# EAGLE board fabwalker-0930-2 (EAGLE 7.4.0)
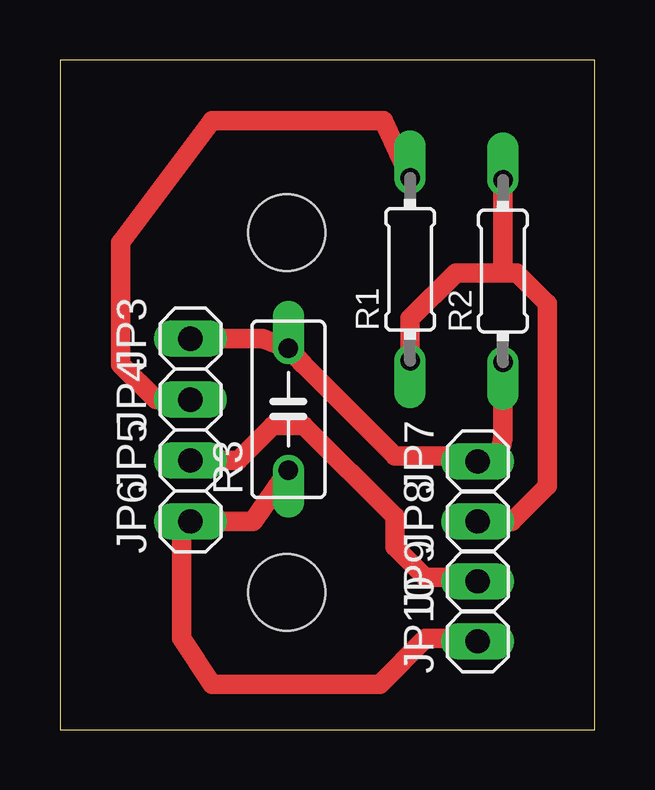
[diagram p0: board, top side]

Size 22.3 x 27.93 mm. Coordinates in mm from the lower left corner, seen from the top.
Outline: 0,0 22.3,0 22.3,27.93 0,27.93 0,0
Copper layers (1*16): Top 0.035mm / dielectric 1.5mm / Bottom 0.035mm
Design rules "default *": minimum track width 10mil, minimum drill 24mil, track to track 0.4mm, track to pad 0.4mm, pad to pad 0.4mm, via to via 0.4mm, smd to smd 0.4mm, copper to edge 0.4mm, drill to drill 0.4mm, minimum pad ring 10mil, minimum via ring 8mil, stop-mask expansion 4mil, vias tented up to drill 0mil, thermal gap 10mil
Holes 3.2 mm at 9.46,5.73 9.46,20.73

## Footprints (pad centres in the part's own frame; a part is rotated, then mirrored left to right if it is on the bottom)
1X01 = drill 1.016 long: 1 0,0
0204/7 = drill 0.813 offset: 1 -3.81,0; 2 3.81,0
C050-030X075 = drill 0.813 offset: 1 -2.54,0; 2 2.54,0

## Placement (x,y rotation side)
JP3  [1X01]  5.44,16.31 90 top
JP4  [1X01]  5.44,13.77 90 top
JP5  [1X01]  5.44,11.23 90 top
JP6  [1X01]  5.44,8.69 90 top
JP7  [1X01]  17.42,11.19 90 top
JP8  [1X01]  17.42,8.69 90 top
JP9  [1X01]  17.42,6.19 90 top
JP10  [1X01]  17.42,3.69 90 top
R1  RES_7MM  [0204/7]  14.6,19.2 90 top
R2  RES_7MM  [0204/7]  18.47,19.13 90 top
R3  CAP_5MM  [C050-030X075]  9.52,13.37 90 top

## Library data of the parts
JP3-JP10 R1-R3 = Yamaguchi

## Nets
N$1: JP3.1 JP7.1 R2.1 R3.2
N$2: JP4.1 R1.2
N$3: JP8.1 R1.1 R2.2
N$4: JP6.1 JP10.1 R3.1
N$6: JP5.1 JP9.1

## Tracks (layer width: path | path; a pad name or v marks a point on that pad's centre or on a via)
N$1
  Top 0.813: R2.1 18.47,12.24 arc-90 JP7.1 17.18,11.43 13.97,11.43 10.16,15.24 R3.2 8.45,16.31 JP3.1
N$2
  Top 0.406: JP4.1 4.01,13.77
  Top 0.813: 4.01,13.77 2.54,15.24 2.54,20.32 6.35,25.4 13.48,25.4 R1.2
N$3
  Top 0.406: JP8.1 18.85,8.69
  Top 0.813: 18.85,8.69 20.32,10.16 20.32,17.78 19.05,19.05 18.47,19.05 | R1.1 14.6,17.14 16.51,19.05 18.47,19.05 | R2.2 18.47,19.05
N$4
  Top 0.406: 17.3,3.81 JP10.1
  Top 0.813: 17.3,3.81 15.24,3.81 13.34,1.9 6.35,1.9 5.08,3.81 5.08,8.33 JP6.1 8.05,8.69 R3.1
N$6
  Top 0.813: JP5.1 7.42,11.23 8.89,12.7 10.16,12.7 13.97,8.89 13.97,7.62 15.24,6.35 17.26,6.35 JP9.1